# Altium PCB JacDacMicroBitShieldLP 29.PcbDoc
Units mm, origin at the board's own origin, x right, y up, seen from the top; angles counter-clockwise.
Board outline 61.5 x 26.59 mm, 2 copper layers (Top Layer, Bottom Layer), stack 1.525 mm thick; 33 components, 11 nets, 160 pads, 32 vias.
Unrouted connection lines stored in the file: 7.
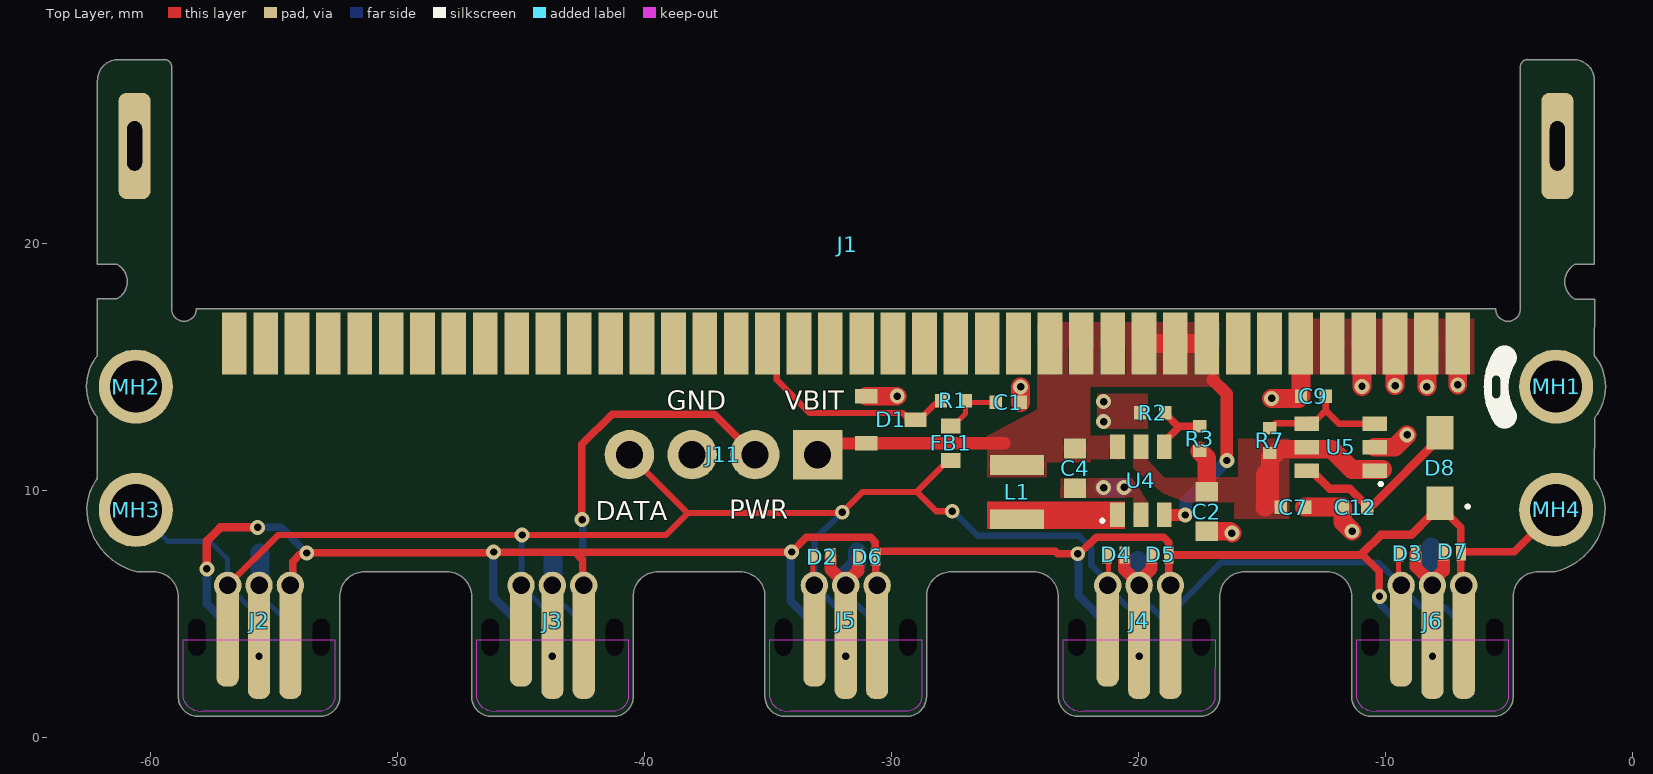
[diagram p0: Top Layer view]
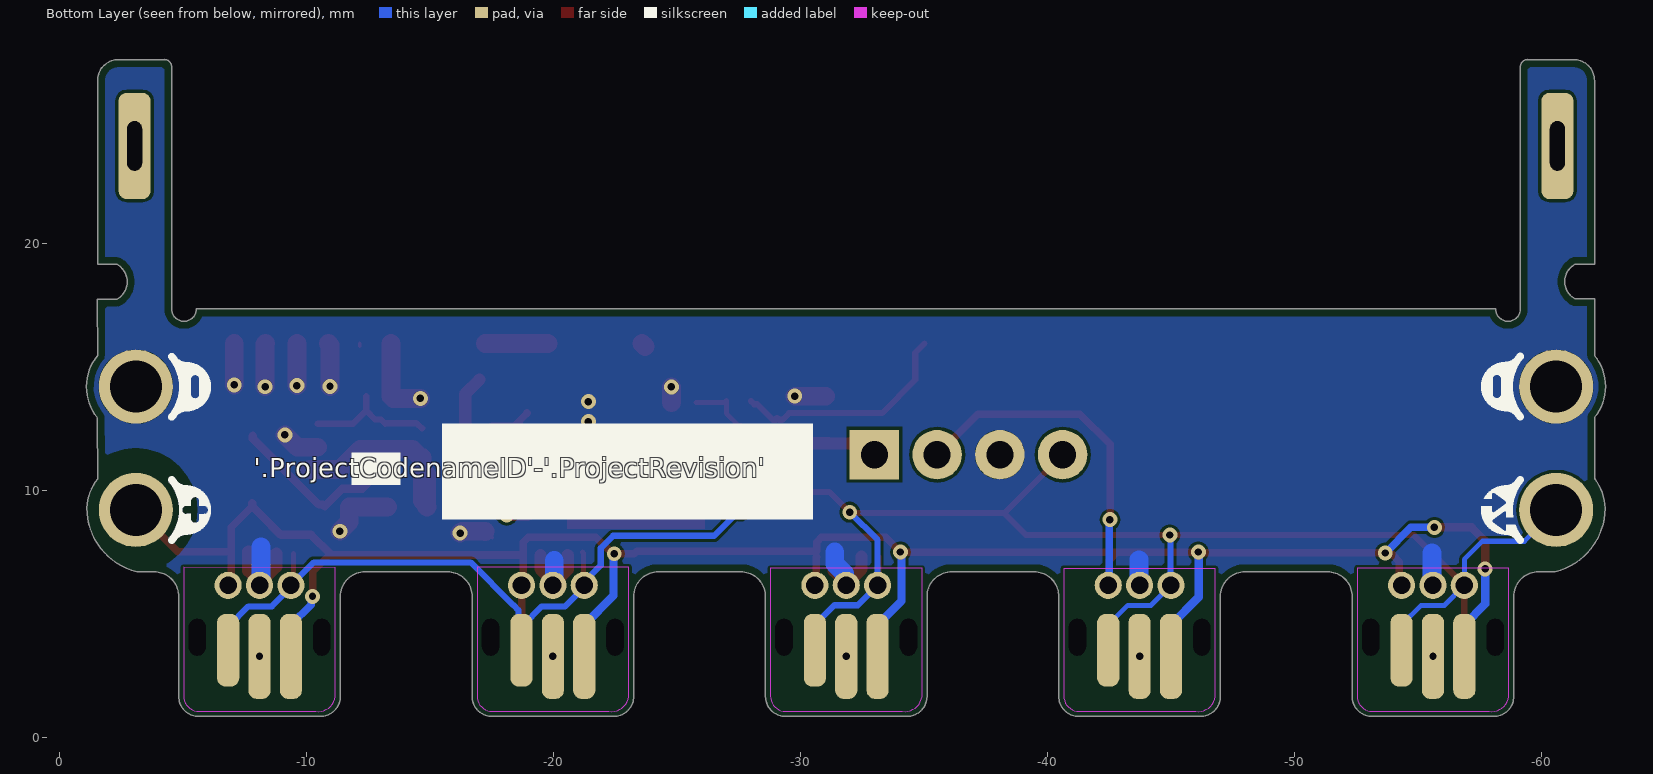
[diagram p1: Bottom Layer view, seen from below]

## Layer stack, top to bottom
Top Solder: solder mask 0.0102, Solder Resist, Dk 3.5
Top Layer: signal copper 0.0356
Dielectric 1: core 1.454, FR-4, Dk 4.2
Bottom Layer: signal copper 0.0356
Bottom Solder: solder mask 0.0102, Solder Resist, Dk 3.5

## Board outline
-58.875,1.644 ccw(c-58.075,1.644) -58.075,0.844 -53.135,0.844 ccw(c-53.135,1.644) -52.335,1.644 -52.335,5.694 cw(c-51.335,5.694) -51.335,6.694 -47.999,6.694 cw(c-47.999,5.694) -46.999,5.694 -46.999,1.644 ccw(c-46.199,1.644) -46.199,0.844 -41.259,0.844 ccw(c-41.259,1.644) -40.459,1.644 -40.459,5.694 cw(c-39.459,5.694) -39.459,6.694 -36.123,6.694 cw(c-36.123,5.694) -35.123,5.694 -35.123,1.644 ccw(c-34.323,1.644) -34.323,0.844 -29.383,0.844 ccw(c-29.383,1.644) -28.583,1.644 -28.583,5.694 cw(c-27.583,5.694) -27.583,6.694 -24.247,6.694 cw(c-24.247,5.694) -23.247,5.694 -23.247,1.644 ccw(c-22.447,1.644) -22.447,0.844 -17.507,0.844 ccw(c-17.507,1.644) -16.707,1.644 -16.707,5.694 cw(c-15.707,5.694) -15.707,6.694 -12.371,6.694 cw(c-12.371,5.694) -11.371,5.694 -11.371,1.644 ccw(c-10.571,1.644) -10.571,0.844 -5.631,0.844 ccw(c-5.631,1.644) -4.831,1.644 -4.831,5.694 cw(c-3.831,5.694) -3.831,6.694 -3.133,6.694 ccw(c-3.775,9.276) -1.115,9.282 ccw(c-3.113,9.205) -1.547,10.449 -1.539,12.927 ccw(c-3.094,14.185) -1.547,15.453 -1.54,17.734 -2.333,17.734 cw(c-1.951,18.434) -2.333,19.134 -1.544,19.134 -1.544,26.573 ccw(c-2.397,26.579) -2.391,27.432 -4.291,27.432 -4.244,27.434 ccw(c-4.244,27.134) -4.544,27.134 -4.543,17.334 cw(c-5.043,17.334) -5.543,17.334 -31.843,17.334 -58.145,17.334 cw(c-58.645,17.334) -59.145,17.334 -59.143,27.134 ccw(c-59.443,27.134) -59.443,27.434 -59.396,27.432 -61.296,27.432 ccw(c-61.296,26.582) -62.147,26.582 -62.147,19.143 -61.357,19.143 cw(c-61.739,18.443) -61.357,17.743 -62.147,17.743 -62.147,15.454 ccw(c-60.593,14.194) -62.149,12.937 -62.151,10.459 ccw(c-60.568,9.229) -62.572,9.271 ccw(c-59.919,9.272) -60.552,6.695 -59.875,6.694 cw(c-59.875,5.694) -58.875,5.694

## Design rules (kind name [scope] priority, off if disabled: settings)
AssemblyTestPointUsage [All] p1: valid=2
BoardOutlineClearance IGNORE_ALIGNMENT_HOLES [InComponent('J1')] p1: gap=0.075 ignorepadtopadclearanceinfootprint=FALSE except(0: THPad-OutlineEdge)
BoardOutlineClearance IGNORE_KEEPOUT [IsKeepOut] p2: gap=0 ignorepadtopadclearanceinfootprint=FALSE
BoardOutlineClearance POLY_COPPER_DISTANCE [IsPolygon] p3: gap=0.3 ignorepadtopadclearanceinfootprint=FALSE
BoardOutlineClearance [All] p4: gap=0.075 ignorepadtopadclearanceinfootprint=FALSE
Clearance CLEARANCE_MH [InNamedPolygon('GND') vs InComponent('MH1') or InComponent('MH4')] p1: gap=0 ignorepadtopadclearanceinfootprint=FALSE except(1: THPad-Fill THPad-Poly THPad-Region)
Clearance CLEARANCE_POLY_DC_DC [InNamedPolygon('DC_DC_VUBIT') or InNamedPolygon('DC_DC_4V05') or InNamedPolygon('DC_DC_GND')] p2: gap=0 ignorepadtopadclearanceinfootprint=FALSE except(0.15: Fill-Fill Fill-Poly Fill-Region Poly-Poly Poly-Region Region-Region)
Clearance [All] p3: gap=0.125 ignorepadtopadclearanceinfootprint=FALSE
DiffPairsRouting [All] p1: maxlimit=2 minlimit=0.15 mostfreqgap=0.15 toplayer_minwidth=0.15 toplayer_maxwidth=2 toplayer_prefwidth=0.15 bottomlayer_minwidth=0.15 bottomlayer_maxwidth=2 bottomlayer_prefwidth=0.15 maxuncoupledlength=25
FabricationTestPointUsage [All] p1: valid=2 allowmultiple=FALSE
HoleSize [All] p1: absolutevalues=TRUE maxlimit=5 minlimit=0.2 maxpercent=80.000 minpercent=20.000
MinimumSolderMaskSliver [All] p1: minsoldermaskwidth=0.005
PlaneClearance [All] p1: clearance=0.3
PlaneConnect [All] p1: planeconnectstyle=Relief reliefexpansion=0.5 reliefentries=4 reliefconductorwidth=0.2 reliefairgap=0.3
PolygonConnect CONNECT_POLY_DC_DC [IsNamedPolygon('DC_DC_GND') or IsNamedPolygon('DC_DC_VUBIT') or IsNamedPolygon('GND') or IsNamedPolygon('DC_DC_4V05')] p1: connectstyle=Relief reliefconductorwidth=0.254 reliefentries=4 polygonreliefangle="90 Angle" airgapwidth=0
PolygonConnect [All] p2: connectstyle=Relief reliefconductorwidth=0.2 reliefentries=4 polygonreliefangle="90 Angle" airgapwidth=0.2
RoutingVias [All] p1: holewidth=0.3 width=0.6 viastyle="Through Hole" minholewidth=0.3 minwidth=0.6 maxholewidth=0.3 maxwidth=0.8
SilkToSilkClearance [All] p1: silktosilkclearance=0.001
SilkToSolderMaskClearance [IsPad] p1: minsilkscreentomaskgap=0.05 clearancetoexposedcopper=TRUE
SolderMaskExpansion SolderMaskExpansion_1 [IsVia] p1: expansion=0.102 istentingtop=TRUE useseparateexpansions=TRUE expansionbottom=0.102 istentingbottom=TRUE
SolderMaskExpansion [All] p2: expansion=0.075 istentingtop=FALSE
Width [All] p1: maxlimit=2 minlimit=0.15 preferedwidth=0.15 minimp=50.000000 maximp=50.000000 favimp=50.000000
21 further rules are at their usual default settings.

## Components (designator, comment, footprint, x,y, rotation, side; value= is the part's Value field where it differs from the comment)
C1 "CL05C330JB51PNC" "C0402_0.55MM - without outline" -25.275,13.55 r180 top
C2 "CL10A106KP8NNNC" "C0603 - without outline" -17.238,9.13 r90 top locked
C4 "CL10A106KP8NNNC" "C0603 - without outline" -22.57,10.88 r90 top
C7 "CL05A475MP5NRNC" "R0402 - Without outline" -13.743,9.305 r180 top
C9 "CL05A475MP5NRNC" "R0402 - Without outline" -12.925,13.8 r0 top
C12 "CL05A475MP5NRNC" "R0402 - Without outline" -11.236,9.313 r0 top
D1 "BAT54S" "NXP-BAT54S-TO-236AB - without outline" -30.025,12.85 r0 top
D2 "RCLAMP0521P-N" "TVS 0402 - L" -32.823,7.31 r0 top
D3 "RCLAMP0521P-N" "TVS 0402 - L" -9.13,7.436 r0 top
D4 "RCLAMP0521P-N" "TVS 0402 - L" -20.925,7.375 r0 top
D5 "RCLAMP0521P-N" "TVS 0402 - L" -19.125,7.375 r180 top
D6 "RCLAMP0521P-N" "TVS 0402 - L" -31,7.3 r180 top
D7 "RCLAMP0521P-N" "TVS 0402 - L" -7.3,7.5 r180 top
D8 "MBR120VLSFT3G" MBR120VLSFT3G -7.8,10.9 r90 top
FB1 "TDK MPZ1608S102ATA00" "TDK MPZ1608 0.8mm - without outline" -27.6,11.9 r90 top
J1 "Planar 1x40p 1.27 mm pitch edge connector for the micro:bit" MIC127-140-D01 -31.843,17.334 r0 top
J2 "Jacdac edge connector" JACDAC_EDGE_CONNECTOR_NO_TRACES -55.605,6.694 r180 top
J3 "Jacdac edge connector" JACDAC_EDGE_CONNECTOR_NO_TRACES -43.729,6.694 r180 top
J4 "JACDAC edge connector" JACDAC_EDGE_CONNECTOR_NO_TRACES -19.977,6.694 r180 top
J5 "Jacdac edge connector" JACDAC_EDGE_CONNECTOR_NO_TRACES -31.853,6.694 r180 top
J6 "Jacdac edge connector" JACDAC_EDGE_CONNECTOR_NO_TRACES -8.101,6.694 r180 top
J11 "0.1\"" "Generic 1x4 2.54mm header" -35.533,11.435 r0 top
L1 "NRH3010T100MN" NRH3010T100MN -24.919,9.919 r270 top
MH1 "" MH_5.0MMK_3.0MMC_2.1MMD_PTH -3.093,14.194 r90 top
MH2 "Mounting holes; 2.5 mm pitch" MH_5.0MMK_3.0MMC_2.1MMD_PTH -60.593,14.194 r90 top
MH3 "Mounting holes; 2.5mm pitch" MH_5.0MMK_3.0MMC_2.1MMD_PTH -60.593,9.196 r90 top
MH4 "MH_5.0MMK_3.0MMC_2.1MMD_PTH" MH_5.0MMK_3.0MMC_2.1MMD_PTH -3.093,9.196 r90 top
R1 "0402WGF2200TCE" "R0402 - Without outline" -27.5,13.625 r0 top
R2 "RC0402FR-07137KL" "R0402 - Without outline" -19.425,13.125 r0 top
R3 "0402WGF1004TCE" "R0402 - Without outline" -17.525,12.081 r270 top
R7 "0402WGF1004TCE" "R0402 - Without outline" -14.689,12.002 r270 top
U4 "TLV61220" "TI-TLV61220 - without_outline" -19.907,10.38 r90 top locked
U5 "TPS2553DBVR" "TI-TPS2553 - without_outline" -11.818,11.734 r180 top

## Footprints (in the part's own frame and the unit in brackets; to place one, negate y for a bottom-side part, rotate by r counter-clockwise, add the part's x,y. Pads: shape width x height; smd on the part's side, far side on the other; paste and mask are expansions set on the pad)
"C0402_0.55MM - without outline" [mm]
  rect 0.5x0.55 smd: 1(-0.5,0) 2(0.5,0)
  body extent -0.5,-0.25 0.5,0.25, height 0.55
"C0603 - without outline" [mm]
  rect 0.8x0.9 smd: 1(-0.8,0) 2(0.8,0)
  body extent -0.9,-0.5 0.9,0.5, height 0.9
"Generic 1x4 2.54mm header" [mm] "1x4 2.54mm 0.1\" header vertical th"
  rect 2x2 hole 1.1: 1(2.54,0)
  round 2 hole 1.1: 2(0,0) 3(-2.54,0) 4(-5.08,0)
  body extent -6.35,-1.27 3.81,1.27, height 8.65
JACDAC_EDGE_CONNECTOR_NO_TRACES [mm] "JacDac 3 pin connector with no traces"
  rrect78% 0.9x2.95 smd far side paste-1 mask+0: 1(-1.27,3.175)
  rrect78% 0.9x4.3 smd paste-1 mask+0: 1(1.27,2.5)
  round 1.11 / inner round 0.71 / far side round 1.1 hole 0.71 paste-0.254 mask+0: 1(1.27,0.55) 2(0,0.55) 3(-1.27,0.55)
  rrect78% 0.9x3.45 smd far side paste-1 mask+0: 2(0,3.425) 3(1.27,3.425)
  rrect78% 0.9x4.8 smd paste-1 mask+0: 2(0,2.75) 3(-1.27,2.75)
  round 0 hole 0.7 slot 1.5 at 90 deg unplated: ""(-2.52,2.65) ""(2.52,2.65)
  Top Layer keep-out region: -3.075,2.75 -3.07,5.033 -2.987,5.341 -2.761,5.567 -2.453,5.65 -2.453,5.65 2.27,5.65 2.545,5.635 2.794,5.516 2.978,5.31 3.07,5.05 3.07,5.05 3.07,2.75
  Bottom Layer lines w0.2: -1.126,0.85 -1.27,0.85
  Bottom Layer keep-out region: -3.07,-0.15 -3.07,5.033 -3.023,5.269 -2.889,5.469 -2.689,5.603 -2.453,5.65 -2.453,5.65 2.27,5.65 2.545,5.635 2.794,5.516 2.978,5.31 3.07,5.05 3.07,5.05 3.07,-0.15
MBR120VLSFT3G [mm] "SODFL, 2-Leads, Body 1.65x3.60mm, IPC Medium Density"
  rect 1.35x1.1 smd: 1(-1.425,0) 2(1.425,0)
  body extent -1.73,-0.82 1.72,0.82, height 0.95
MH_5.0MMK_3.0MMC_2.1MMD_PTH [mm] "Mounting Hole 5.0mm clearance, 3.1 annualar ring and 2.1mm PTH"
  round 3 hole 2.1 mask+0.05: 1(0,0)
MIC127-140-D01 [mm] "Planar 1x40p 1.27 mm pitch edge connector for the micro:bit"
  rect 1x2.5 smd paste-0.254: 1(-24.765,-1.4) 2(-23.495,-1.4) 3(-22.225,-1.4) 4(-20.955,-1.4) 5(-19.685,-1.4) 6(-18.415,-1.4) 7(-17.145,-1.4) 8(-15.875,-1.4) 9(-14.605,-1.4) 10(-13.335,-1.4) 11(-12.065,-1.4) 12(-10.795,-1.4) 13(-9.525,-1.4) 14(-8.255,-1.4) 15(-6.985,-1.4) 16(-5.715,-1.4) 17(-4.445,-1.4) 18(-3.175,-1.4) 19(-1.905,-1.4) 20(-0.635,-1.4) 21(0.635,-1.4) 22(1.905,-1.4) 23(3.175,-1.4) 24(4.445,-1.4) 25(5.715,-1.4) 26(6.985,-1.4) 27(8.255,-1.4) 28(9.525,-1.4) 29(10.795,-1.4) 30(12.065,-1.4) 31(13.335,-1.4) 32(14.605,-1.4) 33(15.875,-1.4) 34(17.145,-1.4) 35(18.415,-1.4) 37(20.955,-1.4) 38(22.225,-1.4) 39(23.495,-1.4) 40(24.765,-1.4)
  rect 1x2.5 smd: 36(19.685,-1.4)
  rrect50% 1.3x4.3 hole 2 slot 0.6 at 0 deg: 41(-28.8,6.6) 42(28.8,6.6)
  round 0 hole 1.15 unplated mask+0: 43(-29.8,1.1) 44(29.892,1.1)
  body extent -30.3,-1.7 30.3,10.1, height 2.95
NRH3010T100MN [mm]
  rect 0.8x2.2 smd paste-0.254: 1(-1.1,0) 2(1.1,0)
  body extent -1.5,-1.5 1.5,1.5, height 1
"NXP-BAT54S-TO-236AB - without outline" [mm] "SOT23, 3-Leads, Body 2.90x2.30mm, Pitch 0.95mm, IPC Medium Density"
  rect 0.9x0.6 smd: 1(-1,0.95) 2(-1,-0.95) 3(1,0)
  body extent -1.32,-1.5 1.32,1.5, height 1.12
"R0402 - Without outline" [mm]
  rect 0.5x0.55 smd: 1(-0.5,0) 2(0.5,0)
  body extent -0.5,-0.25 0.5,0.25, height 0.35
"TDK MPZ1608 0.8mm - without outline" [mm]
  rect 0.6x0.8 smd paste-0.1: 1(-0.7,0) 2(0.7,0)
  body extent -0.8,-0.4 0.8,0.4, height 0.8
"TI-TLV61220 - without_outline" [mm] "SOT23, 6-Leads, Body 2.90x2.80mm, Pitch 0.95mm, IPC Medium Density"
  rect 1x0.6 smd: 1(-1.375,0.95) 2(-1.375,0) 3(-1.375,-0.95) 4(1.375,-0.95) 5(1.375,0) 6(1.375,0.95)
  body extent -1.52,-1.52 1.53,1.53, height 1.1
"TI-TPS2553 - without_outline" [mm] "SOT23, 6-Leads, Body 2.90x2.80mm, Pitch 0.95mm, IPC Medium Density"
  rect 1x0.6 smd: 1(-1.375,0.95) 2(-1.375,0) 3(-1.375,-0.95) 4(1.375,-0.95) 5(1.375,0) 6(1.375,0.95)
  body extent -1.52,-1.52 1.53,1.53, height 1.1
"TVS 0402 - L" [mm] "TVS 0402 RoHS"
  rect 0.4x0.7 smd paste-0.038 mask+0.05: 1(-0.35,0) 2(0.35,0)
  body extent -0.5,-0.3 0.5,0.3, height 0.5

## Part data
C1: "CAP CER 33PF 50V NP0 0402", Capacitance=33pF, Case Code (Imperial)=0402, Case Code (Metric)=1005, Manufacturer=Samsung, Max Operating Temperature=125°C, Min Operating Temperature=-55°C, Ratings=AEC-Q200, Supplier Part Number 1=1276-6515-1-ND, Tolerance=5%, Voltage Rating=50V, Case/Package=0402, Category=Capacitors, Checked=?, ComponentLink1Description="Samsung datasheet online", ComponentLink1URL=http://www.samsungsem.com/kr/support/library/product-catalog/mlcc.jsp, Created=DG, Lead Free="Lead Free", Length=0.039inch, Manufacturer Part Number=CL05C330JB51PNC, Mount="Surface Mount", Packaging="Tape and Reel", Pricing 1="1=0.10000, 10=0.07500, 50=0.04060, 100=0.03320, 500=0.02374, 1000=0.01865, 2500=0.01696, 5000=0.01560 (USD)", Pricing 2="1=0.11000, 10=0.08200, 100=0.03600, 500=0.02600, 1000=0.02000, 2500=0.01800 (USD)", Pricing 3="10000=0.00780 (USD)", RoHS=Yes, Stock 1=250654, Stock 2=97900, Stock 3=100000, Supplier 1=Digi-Key, Supplier 2=Mouser, Supplier 3="Future Electronics", Supplier Part Number 2=187-CL05C330JB51PNC, Supplier Part Number 3=6022520, Thickness=0.022inch, Width=0.02inch
C2 C4: "CAP CER 10UF 10V X5R 0603", Capacitance=10uF, Case Code (Imperial)=0603, Case Code (Metric)=1608, Dielectric=X5R, Manufacturer=Samsung, Max Operating Temperature=85°C, Min Operating Temperature=-55°C, Package Quantity=1, Supplier Part Number 1=1276-1192-1-ND, Tolerance=10%, Voltage Rating=10V, Case/Package=0603, Category="Ceramic Capacitors", ComponentLink1Description="Online datasheet", ComponentLink1URL=https://datasheet.ciiva.com/26877/getdatasheetpartid-359551-26877881.pdf, Contact Plating=Tin, Depth=0.8mm, Height=0.8mm, Lead Free="Lead Free", Length=1.6mm, Manufacturer Part Number=CL10A106KP8NNNC, Material=Ceramic, Mount="Surface Mount", Packaging="Tape and Reel", Pricing 1="1=0.21000, 10=0.14800, 50=0.08420, 100=0.06980, 500=0.04892, 1000=0.04050 (USD)", Pricing 2="1=0.19000, 10=0.13200, 100=0.06700, 500=0.04500, 1000=0.04000, 2500=0.03400 (USD)", Pricing 3="10=0.08380, 100=0.06930, 500=0.04170, 1000=0.03410, 2000=0.03370, 4000=0.02700, 20000=0.02200 (GBP)", Radiation Hardening=No, RoHS=Yes, Stock 1=1098575, Stock 2=194338, Stock 3=11777, Supplier 1=Digi-Key, Supplier 2=Mouser, Supplier 3=Farnell, Supplier Part Number 2=187-CL10A106KP8NNNC, Supplier Part Number 3=3013386, Thickness=0.035inch, Voltage Rating (DC)=10V, Width=0.031inch
C7 C9 C12: "CAP CER 4.7UF 10V X5R 0402", Capacitance=4.7uF, Case Code (Imperial)=0402, Case Code (Metric)=1005, Dielectric=X5R, Manufacturer=Samsung, Max Operating Temperature=85°C, Min Operating Temperature=-55°C, Package Quantity=10000, Supplier Part Number 1=1276-1482-2-ND, Tolerance=20%, Voltage Rating=10V, Case/Package=0402, Category="Ceramic Capacitors", Checked By=?, ComponentLink1Description="Online datasheet", ComponentLink1URL=https://datasheet.ciiva.com/25786/cl05a475mp5nrnc-25786963.pdf, Created By="D. Gakure", Lead Free="Lead Free", Length=0.039inch, Manufacturer Part Number=CL05A475MP5NRNC, Mount="Surface Mount", Packaging="Tape and Reel", Pricing 1="10000=0.01405, 20000=0.01338 (USD)", Pricing 2="1=0.23500, 500=0.03970, 1500=0.02900, 2500=0.02500, 5000=0.02050 (USD)", RoHS=Yes, RoHS Compliant=Yes, Series=CL, Stock 1=840000, Stock 2=2004, Supplier 1=Digi-Key, Supplier 2="Future Electronics", Supplier Part Number 2=2103694, Thickness=0.022inch, Width=0.02inch
D1: "DIODE ARRAY SCHOTTKY 30V SOT23", Manufacturer=Nexperia, Manufacturer Part Number=BAT54S,235, Supplier Part Number 1=1727-1868-1-ND, Category="Rectifier Diodes", ComponentLink1Description="NXP datasheet online", ComponentLink1URL=https://assets.nexperia.com/documents/data-sheet/BAT54_SER.pdf, Pricing 1="1=0.13000, 10=0.11900, 100=0.05610, 500=0.03326, 1000=0.02185, 5000=0.02138 (USD)", RoHS=No, Stock 1=14011, Supplier 1=Digi-Key, Supplier 2=Mouser, Supplier 3=RSComponents, Supplier Part Number 2=771-BAT54S235, Supplier Part Number 3=1707990
D2 D3 D4 D5 D6 D7: "Bidirectional 5V (Max) 6V 16V 3.5A (8/20us) 0402 TVS RoHS", Manufacturer="Born Semiconductor", Package=0402, Supplier1 Part Number=C316043, Checked By=?, ComponentLink1Description="Online datasheet", ComponentLink1URL=https://datasheet.lcsc.com/szlcsc/Bourne-Semicon-Shenzhen-RCLAMP0521P-N_C316043.pdf, Created By="D Gakure", Manufacturer Part Number=RCLAMP0521P-N, Supplier1=LCSC
D8: "DIODE SCHOTTKY 20V 1A SOD123FL", Average Rectified Current=1A, Forward Voltage=340mV, Manufacturer="ON Semiconductor", Max Forward Surge Current (Ifsm)=45A, Max Operating Temperature=125°C, Max Repetitive Reverse Voltage (Vrrm)=20V, Max Reverse Leakage Current=600uA, Min Operating Temperature=-65°C, Package Quantity=10000, Supplier Part Number 1=MBR120VLSFT3GOSCT-ND, Category="Schottky Diodes", ComponentLink4Description="On Semi datasheet online", ComponentLink4URL=https://datasheet.ciiva.com/6380/mbr120vlsft1-d-6380910.pdf, Current Rating=1A, Element Configuration=Single, Forward Current=1A, Halogen Free="Halogen Free", Lead Free="Lead Free", Manufacturer Part Number=MBR120VLSFT3G, Max Reverse Voltage (DC)=20V, Max Surge Current=45A, Number of Pins=2, Output Current=1A, Packaging="Tape and Reel", Peak Non-Repetitive Surge Current=45A, Peak Reverse Current=600uA, Polarity=Standard, Pricing 1="1=0.39000, 10=0.28600, 100=0.19920, 500=0.12616, 1000=0.10292, 2000=0.09960, 5000=0.09628 (USD)", Radiation Hardening=No, REACH SVHC="No SVHC", RoHS=Yes, Stock 1=32481, Supplier 1=Digi-Key, Supplier 2=Mouser, Supplier 3=RSComponents, Supplier Part Number 2=863-MBR120VLSFT3G, Supplier Part Number 3=1867479, Voltage Rating (DC)=20V
FB1: "0603 1k@100MHz 0.8A chip", Case Code (Imperial)=0603, Case Code (Metric)=1608, Current Rating=800mA, DC Resistance (DCR)=300mR, Manufacturer=TDK, Manufacturer Part Number=MPZ1608S102ATA00, Package Quantity=4000, Supplier Part Number 1=445-8694-1-ND, Tolerance=25%, Case/Package=0603, ComponentLink2Description="datasheet online", ComponentLink2URL=https://www.mouser.co.uk/datasheet/2/400/eads_commercial_power_mpz1608_en-923650.pdf, ComponentLink3Description=datasheet, ComponentLink3URL="Y:\System\Altium\Libraries 2014\TDK\Datasheets\eads_commercial_power_mpz1608_en-923650.pdf", Core Material=Ferrite, Height=0.037inch, Impedance="1kR @ 100MHz", Length=0.063inch, Max DC Current=800mA, Mount="Surface Mount", Packaging="Tape and Reel", Pricing 1="1=0.1, 10=0.079, 25=0.0716, 50=0.0644, 100=0.0472, 250=0.03432, 500=0.03146, 1000=0.02717 (USD)", Stock 1=113542, Supplier 1=Digi-Key, Supplier 2=Mouser, Supplier Part Number 2=810-MPZ1608S102ATA00, Width=0.031inch
J1: library part MIC127-140-D01, "\"Same plane\" 1x40p 1.27mm Dongguan Yuliang BBC micro:bit edge connector", Manufacturer="Dongguan Yuliang", ComponentLink1Description="Yuliang drawing", ComponentLink1URL="Y:\System\Altium\Libraries 2014\Yuliang\Datasheets\YULIANG-MIC127-140-D01.pdf", ComponentLink2Description="Yuliang drawing online", ComponentLink2URL=http://www.dgyuliang.net/d/file/Produtcs/Customized%20Connector/MICRO%20BIT%20Connector/aff70b8859d81d58072ddeb323d41b1d.pdf, Manufacturer Part Number=MIC127-140-D01
J2 J3 J4 J5 J6: "3 pin jacdac edge connector 1.27mm pitch", Manufacturer Part Number=JACDAC_EDGE_CONNECTOR, Checked By=?, ComponentLink1Description="Yuliang JACDAC cable connector drawing online", ComponentLink1URL=https://github.com/microsoft/jacdac-mdk/blob/main/connector/JACDAC-Connector-by-Yuliang-2020-11-28.pdf, ComponentLink2Description="JACDAC PCB edge connector spec onlin", ComponentLink2URL=https://github.com/microsoft/jacdac-mdk/blob/main/connector/JACDAC_PCB_Edge_Connector_Drawing_JD-PEC-01_rev_01.pdf, Created By="D. Gakure", PCB Type="1.6mm FR4"
J11: library part "Header Multicomp 2211S-04G-whitesch", "2.54mm, 4x1 way, vertical, square pin, gold plate", Contact Resistance=20, Current Rating=3, Flammability Rating=UL94V-0, Insulation Resistance=1000, Manufacturer=Multicomp, Manufacturer Part Number=2211S-04G, Operating Temperature Max=105, Operating Temperature Min=-40, Supplier Part Number 1=1593413, Voltage Rating V AC=250, Withstand Voltage="600V<!--FANDB--><div class=\"features-and-benefits-container\"><div class=\"features-and-benefits-description\"><span class=\"features-benefits-value\">The 2211S-04G is a 4-pin 1-row PCB Header with gold plated copper alloy contacts and a black high temperature plastic (PBT) insulator. This board-to-board holder is ideal for through hole vertical mounting.</span></div><div class=\"features-and-benefits-list\"><ul class=\"features-and-benefits-list-list\"><li class=\"features-and-benefits-list-item\">3A AC/DC Rated current</li><li class=\"features-and-benefits-list-item\">250VAC/DC Rated voltage</li><li class=\"features-and-benefits-list-item\">20", ComponentLink1Description="header strip datasheet", ComponentLink1URL=http://www.farnell.com/datasheets/1518407.pdf, Contact Material="Copper Alloy", Contact Plating="Gold Plated Contacts", Contact Termination=Solder, Contact Termination Type="Through Hole", Created By=HUGHWI, Gender=Header, Lead Spacing=2.54, No. of Contacts=4, No. of Rows=1, Pitch Spacing=2.54, Pricing 1="1=0.0973, 5=0.0918, 25=0.0864, 50=0.0808, 100=0.0753, 250=0.032 (GBP)", Product Range=2211, RoHS=YES, Stock 1=2760, Supplier 1=Farnell, SVHC="No SVHC (17-Dec-2015)", Termination Method=Solder
L1: "Inductor, Shielded, 10uH, 600mA, SMD; NRH Series; Inductance:10 H; Inductance Tolerance: 20%; Inductor Construction:Shielded; DC Resistance Max:0.35ohm; RMS Current (Irms):620mA; Saturation Current (Isat):600mA ;RoHS Compliant: Yes", Case/Package=3010, Current Rating=620mA, DC Resistance (DCR)=350mR, Inductance=10uH, Inductance Tolerance=20%, Manufacturer="Taiyo Yuden", Max DC Current=600mA, Max Operating Temperature=120°C, Min Operating Temperature=-25°C, Package Quantity=2000, Self Resonant Frequency=34MHz, Supplier Part Number 1=587-2575-1-ND, Test Frequency=100kHz, Category="Fixed Inductors", ComponentLink2Description="Taiyo Yuden spec sheet online", ComponentLink2URL=https://datasheet.ciiva.com/1043/nrh3010t100mn-ss-1043273.pdf, ComponentLink3Description="Taiyo Yuden data sheet (2015) online", ComponentLink3URL=https://datasheet.ciiva.com/8002/wound04-e-8002182.pdf?src-supplier=Element14, Composition=Wirewound, Core Material=Ferrite, Depth=3.1mm, Halogen Free="Halogen Free", Height=1mm, Height - Seated (Max)=0.039inch, Lead Free="Lead Free", Length=3mm, Manufacturer Part Number=NRH3010T100MN, Mount="Surface Mount", Packaging="Tape and Reel", Pricing 1="1=0.31000, 10=0.27600, 25=0.24120, 50=0.20680, 100=0.18950, 250=0.17224, 500=0.16192, 1000=0.12402 (USD)", Radiation Hardening=No, REACH SVHC=Unknown, RMS Current (Irms)=620mA, RoHS=Yes, Saturation Current=600mA, Shielding=Shielded, Stock 1=2000, Supplier 1=Digi-Key, Supplier 2=Mouser, Supplier Part Number 2=963-NRH3010T100MN, Termination=SMD/SMT, Tolerance=20%, Width=3mm
MH1 MH2 MH3: library part MH_5.0MMK_3.0MMC_2.1MMD_PTH, "Mounting Hole 5.0mm keepout, 3.0mm annualar ring and 2.1mm Drill PTH"
MH4: "Mounting Hole 5.0mm keepout, 3.0mm annualar ring and 2.1mm Drill PTH"
R1: "RES SMD 220 OHM 1% 1/16W 0402", Case Code (Imperial)=0402, Manufacturer="Uniroyal Elec", Resistance=220R, Tolerance=1%, Manufacturer Part Number=0402WGF2200TCE
R2: "RES SMD 137K OHM 1% 1/16W 0402", Case Code (Imperial)=0402, Case Code (Metric)=1005, Manufacturer=Yageo, Max Operating Temperature=155°C, Max Power Dissipation=63mW, Min Operating Temperature=-55°C, Power Rating=62.5mW, Resistance=137kR, Resistor Type="Thick Film", Supplier Part Number 1=YAG2972CT-ND, Temperature Coefficient=100ppm/°C, Tolerance=1%, Voltage Rating=50V, Case/Package=0402, Category="Chip SMD Resistors", ComponentLink1Description="Online datasheet", ComponentLink1URL=https://datasheet.ciiva.com/16744/pyu-rc0402-51-rohs-l-6-r-16744009.pdf, Construction=Rectangular, Contact Plating=Tin,Matte, Depth=0.5mm, Features="Moisture Resistant", Height=0.016inch, Lead Free="Lead Free", Length=1mm, Manufacturer Part Number=RC0402FR-07137KL, Military Standard=Not, Number of Terminations=2, Packaging="Tape and Reel", Pricing 1="1=0.10000, 10=0.01600, 100=0.00660, 1000=0.00299, 2500=0.00259, 5000=0.00214 (USD)", Pricing 2="10000=0.00090, 20000=0.00088, 40000=0.00086, 60000=0.00084, 80000=0.00081, 100000=0.00079, 1000000=0.00077 (USD)", Pricing 3="1=0.10000, 10=0.01600, 50=0.01600, 100=0.00600, 1000=0.00300, 10000=0.00100 (USD)", RoHS=Yes, RoHS Compliant=Yes, Series=RC, Stock 1=47599, Supplier 1=Digi-Key, Supplier 2=Avnet, Supplier 3=Mouser, Supplier Part Number 2=RC0402FR-07137KL, Supplier Part Number 3=603-RC0402FR-07137KL, Technology="THICK FILM", Termination=SMD/SMT, Width=0.02inch, Working Voltage=50V
R3 R7: "RES SMD 1M OHM 1% 1/16W 0402", Case Code (Imperial)=0402, Manufacturer="Uniroyal Elec", Resistance=1M, Tolerance=1%, Manufacturer Part Number=0402WGF1004TCE
U4: "IC REG BST ADJ 0.22A SYNC SOT23", Case/Package=SOT-23-6, Manufacturer 1="Texas Instruments", Manufacturer Part Number=TLV61220DBVR, Max Input Voltage=5.5V, Max Operating Temperature=85°C, Max Output Current=400mA, Min Input Voltage=700mV, Min Operating Temperature=-40°C, Min Output Voltage=1.8V, Output Current=200mA, Package Quantity=1, Quiescent Current=5uA, Supplier Part Number 1=296-30547-1-ND, Switching Frequency=2MHz, Category="Voltage Regulators - Switching", ComponentLink5Description="Datasheet (online)", ComponentLink5URL=https://www.ti.com/lit/ds/symlink/tlv61220.pdf, ComponentLink6Description="Datasheet (offline)", ComponentLink6URL="Y:\System\Altium\Libraries 2014\TexasInstruments\datasheets\tlv61220.pdf", Efficiency=95%, Height=1.3mm, Lead Free="Lead Free", Length=3.05mm, Max Output Voltage=5.5V, Mount="Surface Mount", Number of Outputs=1, Number of Pins=6, Output Configuration=Positive, Output Type=Adjustable, Output Voltage=5.5V, Packaging="Tape and Reel", Pricing 1="1=0.99000, 10=0.88500, 25=0.84000, 100=0.64500, 250=0.57000, 500=0.54000, 1000=0.42000 (USD)", Radiation Hardening=No, REACH SVHC="No SVHC", RoHS=Yes, Stock 1=42159, Supplier 1=Digi-Key, Supplier 2=Farnell, Supplier 3=Mouser, Supplier Part Number 2=3007284, Supplier Part Number 3=595-TLV61220DBVR, Synchronous Rectifier=Yes, Topology=Boost, Width=1.75mm
U5: "POWER LOAD SWITCH, HIGH SIDE, SOT-23-6; Power Load Switch Type:High Side; Input Voltage:6.5V; Current Limit:1.7A; On State Resistance:0.085ohm; Distribution Switch Case Style:SOT-23; No. of Pins:6; Thermal Protection:Yes; On / Enable;RoHS Compliant: Yes", Case/Package=SOT-23, Manufacturer 1="Texas Instruments", Max Input Voltage=6.5V, Max Operating Temperature=85°C, Max Power Dissipation=625mW, Min Input Voltage=2.5V, Min Operating Temperature=-40°C, On-State Resistance=85mR, Output Current=1.5A, Package Quantity=1, Supplier Part Number 1=296-32464-1-ND, Category="Hot Swap Controllers", ComponentLink1Description=https://datasheet.ciiva.com/15108/getdatasheetpartid-297517-15108509.pdf?src-supplier=Verical, ComponentLink1URL=https://datasheet.ciiva.com/15108/getdatasheetpartid-297517-15108509.pdf?src-supplier=Verical, Lead Free="Lead Free", Manufacturer Part Number=TPS2553DBVR, Max Supply Voltage=6.5V, Min Supply Voltage=2.5V, Number of Outputs=1, Number of Pins=6, Packaging="Tape and Reel", Pricing 1="1=1.20000, 10=1.07100, 25=1.01640, 100=0.78050, 250=0.68972, 500=0.65340, 1000=0.50820 (USD)", Radiation Hardening=No, REACH SVHC="No SVHC", RoHS=Yes, Stock 1=14713, Supplier 1=Digi-Key, Supplier 2=Farnell, Supplier 3=Mouser, Supplier Part Number 2=3124082, Supplier Part Number 3=595-TPS2553DBVR, Weight=0.00127oz

## Via types
v1: diameter 0.6, hole 0.3, Top Layer to Bottom Layer, tented both sides, 32 vias

## Nets (pads, with @x,y where several pads share a name; then routed paths per layer and width w, separated by ;. In a path a pad name is that pad's centre, name@x,y a point inside that pad or via, vN(x,y) a via of type N, cw(c..) or ccw(c..) an arc to the next point about the centre after c; other vN are vias at no path point)
4V15: C2.2 C7.2 R3.2 R7.2 U4.5 U5.1 U5.5 | length 10.7
  Top Layer w0.254: C2.2 -17.238,10.885
  Top Layer w0.762: R3.2 -17.238,11.295 -17.238,10.885 C2.2 ; -14.883,9.313 -14.864,9.332 -14.864,10.65 ; -14.689,9.557 -14.689,11.327 -14.614,11.327 -14.289,11.653 U5.5@-13.274,11.653 ; U5.5@-13.112,11.653 -12.176,11.653 -11.356,10.832 U5.1@-10.118,10.832
GND: C1.1 C2.1 C4.1 C7.1 C9.1 C12.1 D1.1 D2.2 D3.2 D4.2 D5.2 D6.2 D7.2 J1.35 J1.36 J1.37 J1.38 J1.39 J1.40 J2.2 J3.2 J4.2 J5.2 J6.2 J11.3 MH1.1 MH2.1 R2.1 U4.2 U5.2 | length 34.1
  Top Layer w0.15: C2.1@-17.523,8.078 C2.1@-17.296,8.305 ; J1.35@-13.5,15.863 J1.35 ; C9.1@-13.428,13.803 C9.1 ; J1.36@-12.158,15.834 J1.36
  Top Layer w0.5: D2.2 -32.473,6.809 -31.853,6.19 -31.853,6.144 -31.853,6.239 -31.35,6.742 D6.2 ; D4.2 -20.575,6.787 J4.2@-19.977,6.19 ; J4.2@-19.977,6.144 J4.2@-19.977,6.19 ; D5.2 -19.475,6.812 -19.977,6.309 J4.2@-19.977,6.19 ; D3.2 -8.78,6.898 -8.101,6.219 -8.101,6.144 -8.101,6.291 -7.65,6.742 D7.2
  Top Layer w0.762: D1.1 v1@-29.778,13.8 ; C1.1 v1(-24.775,14.178) ; C2.1 -17.236,8.332 -16.294,8.332 v1(-16.221,8.259) ; v1(-14.614,13.712) -13.513,13.712 C9.1 ; C9.1@-13.428,13.803 J1.35 ; C7.1@-13.283,9.313 C12.1 -11.736,8.712 v1(-11.356,8.332) ; v1(-10.955,14.199) -10.955,15.868 J1.37 ; U5.2 -9.627,11.734 v1(-9.126,12.235) ; J1.38 -9.616,15.932 v1(-9.616,14.229) ; J1.39 -8.325,15.911 v1(-8.325,14.186) ; v1(-7.078,14.259) J1.40
  Bottom Layer w0.762: J2.2@-55.605,6.144 -55.563,6.186 -55.563,7.456 ; J3.2@-43.729,6.144 -43.704,6.17 -43.704,7.179 ; J5.2@-31.853,6.144 -31.789,6.209 -31.789,6.62 -31.39,7.019 -31.39,7.494 ; v1(-21.413,10.1) -21.134,10.1 -21.122,10.112 v1(-20.583,10.112) ; -20.034,7.156 -20.034,6.201 J4.2@-19.977,6.144 ; -8.162,7.7 -8.162,6.205 J6.2@-8.101,6.144
  other v1: -55.605,3.269 -43.729,3.269 -31.853,3.269 -19.977,3.269 -8.101,3.269 -21.415,12.772 -21.413,13.585 -29.769,13.808
JD_DATA: D2.1 D3.1 D4.1 FB1.1 J2.1 J3.1 J4.1 J5.1 J6.1 J11.4 MH3.1 | length 93.7
  Top Layer w0.203: D2.1 -33.173,6.194 J5.1@-33.123,6.144 ; J4.1@-21.247,6.144 -21.211,6.181 -21.211,7.458 D4.1@-21.175,7.494 ; D3.1 -9.48,6.253 -9.371,6.144 J6.1@-9.398,6.171
  Top Layer w0.25: J2.1@-56.875,4.194 -56.875,6.144 -54.838,8.182 v1(-44.955,8.182) -39.135,8.182 -38.247,9.069 ; J11.4 -38.247,9.069 ; FB1.1 -27.7,11.2 -28.97,9.93 ; v1(-27.539,9.148) -28.188,9.148 -28.97,9.93 ; -38.247,9.069 -32.035,9.069 v1(-31.997,9.107) -31.174,9.93 -28.97,9.93
  Bottom Layer w0.203: MH3.1 -60.572,9.196 -59.306,7.93 -57.606,7.93 -56.875,7.2 -56.875,6.144 -56.069,5.338 -55.129,5.338 -54.335,4.544 J2.1@-54.335,3.519 ; MH3.1@-59.348,9.657 MH3.1@-59.332,9.657 ; J3.1@-44.977,6.167 -44.999,6.144 -44.193,5.338 -43.253,5.338 -42.459,4.544 J3.1@-42.459,3.519 ; v1@-44.977,8.159 v1(-44.955,8.182)
  Bottom Layer w0.25: J3.1@-44.977,6.167 v1@-44.977,8.159 ; v1(-31.997,9.107) -33.123,7.981 -33.123,6.144 -32.317,5.338 -31.377,5.338 -30.583,4.544 J5.1@-30.583,3.519 ; v1(-27.539,9.148) -27.504,9.148 -26.506,8.15 -22.413,8.15 -21.914,7.651 -21.914,6.959 -21.247,6.292 -21.247,6.071 -20.468,5.292 -19.528,5.292 -18.753,4.516 -18.707,4.516 -18.584,4.64 -18.584,5.146 -18.386,5.344 -18.376,5.344 -16.645,7.075 -10.302,7.075 -9.371,6.144 -9.371,6.071 -8.592,5.292 -7.652,5.292 -6.831,4.471 J6.1@-6.831,3.519 ; J4.1@-18.707,3.519 J4.1@-18.707,4.471
JD_DATA_MCU: D1.3 J1.18 R1.1 | length 9.3
  Top Layer w0.25: J1.18 -34.648,15.564 -34.648,14.465 -33.302,13.119 -29.544,13.119 -29.275,12.85 -29.125,12.85 -29.068,12.907 D1.3@-29.025,12.907 ; D1.3 -28.875,12.85 -28.25,13.475 -28.125,13.475 R1.1@-28,13.6
JD_PWR: D5.1 D6.1 D7.1 D8.1 J2.3 J3.3 J4.3 J5.3 J6.3 J11.2 MH4.1 | length 106.7
  Top Layer w0.304: J2.3@-54.335,6.144 -54.248,6.232 -54.248,7.105 -53.956,7.397 -53.729,7.397 v1(-53.672,7.454) ; v1@-53.652,7.474 -46.129,7.474 v1(-46.109,7.494) -42.831,7.494 ; v1(-42.529,8.806) -42.536,8.814 -42.536,11.852 -41.311,13.077 -37.175,13.077 J11.2 ; J3.3@-42.459,6.144 -42.493,6.178 -42.493,7.156 -42.831,7.494 ; D6.1 -30.638,7.288 -30.638,6.199 J5.3@-30.583,6.144 ; v1(-22.464,7.423) -23.264,7.423 -23.372,7.53 -30.65,7.53 -30.65,7.894 -30.844,8.088 -33.453,8.088 v1(-34.046,7.494) -42.831,7.494 ; v1@-22.411,7.476 -22.334,7.476 -21.71,8.1 -18.981,8.1 -18.775,7.894 D5.1 -18.775,6.212 -18.707,6.144 J4.3@-18.707,3.944 ; -10.969,7.414 -10.246,6.691 v1(-10.246,5.7) ; D8.1@-7.8,9.35 -6.95,8.5 D7.1 -4.789,7.5 MH4.1 ; D7.1@-6.948,7.498 -6.948,6.261 J6.3@-6.831,6.144
  Top Layer w0.34: v1(-57.714,6.812) -57.714,7.946 -57.171,8.489 v1(-55.665,8.489) ; J2.3@-54.335,6.144 J2.3@-54.255,6.225 ; D5.1@-18.6,7.375 -10.969,7.375 ; -10.969,7.414 -10.193,8.19 -8.96,8.19 -8.18,8.97 -7.8,9.35 D8.1
  Bottom Layer w0.304: v1(-55.665,8.489) -54.708,8.489 v1(-53.672,7.454) ; v1(-42.529,8.806) -42.494,8.772 -42.494,6.179 J3.3@-42.459,6.144 ; v1(-10.246,5.7) -10.19,5.643 -10.19,5.363 -9.371,4.544 J6.3@-9.371,3.269
  Bottom Layer w0.34: v1@-57.72,6.784 -57.72,5.389 -56.875,4.544 J2.3@-56.875,3.269 ; v1(-46.109,7.494) -46.123,7.48 -46.123,5.668 -44.999,4.544 J3.3@-44.999,3.269 ; v1(-34.046,7.494) -34.092,7.449 -34.092,5.513 -33.123,4.544 J5.3@-33.123,3.269 ; v1(-22.464,7.423) -22.43,7.389 -22.43,5.727 -21.247,4.544 J4.3@-21.247,3.269
NetC1_2: C1.2 FB1.2 R1.2 | length 2.6
  Top Layer w0.203: FB1.2 -27.5,12.6 -27,13.1 -27,13.55 R1.2 -26.925,13.55 C1.2
NetC9_2: C9.2 R7.1 U5.3 U5.4 | length 5.4
  Top Layer w0.254: R7.1 -14.664,12.502 -14.455,12.712 U5.4@-13.193,12.712 ; U5.4 -13.02,12.857 -12.791,12.857 -12.425,13.223 ; C9.2 -12.425,13.223 ; U5.3 -11.886,12.684 -12.425,13.223
NetC12_2: C12.2 D8.2 U5.6 | length 7.2
  Top Layer w0.34: U5.6 -12.993,10.784 -12.268,10.058 -11.456,10.058 -10.816,9.418 -10.736,9.338 -10.656,9.418 -10.496,9.418 -7.833,12.081 D8.2@-7.833,12.206
NetL1_2: L1.2 U4.1
NetR2_2: R2.2 R3.1 U4.4 | length 2.7
  Top Layer w0.3: U4.4 -18.957,11.955 -18.33,12.581 ; R2.2@-18.941,13.109 R2.2 -18.925,13.1 -18.406,12.581 -18.33,12.581 ; R3.1 -18.33,12.581
VBIT: C4.2 D1.2 J1.27 J1.28 J1.29 J1.30 J1.31 J1.32 J11.1 L1.1 U4.3 U4.6 | length 17.6
  Top Layer w0.5: J11.1 -32.541,11.886 -31.139,11.886 D1.2@-31.125,11.9 ; D1.2@-31.025,11.892 -25.428,11.892 ; U4.3 v1(-18.107,8.992) ; -16.997,14.465 -16.425,13.893 v1(-16.425,11.2)
  Top Layer w0.762: J1.27@-23.707,15.815 J1.27 ; J1.30 J1.31 J1.32
  Bottom Layer w0.5: v1(-18.107,8.992) -18.087,9.012 -18.087,9.538 v1(-16.425,11.2)
pads on no net: J1.1 J1.2 J1.3 J1.4 J1.5 J1.6 J1.7 J1.8 J1.9 J1.10 J1.11 J1.12 J1.13 J1.14 J1.15 J1.16 J1.17 J1.19 J1.20 J1.21 J1.22 J1.23 J1.24 J1.25 J1.26 J1.33 J1.34 J1.41 J1.42 J1.43 J1.44 J2. J3. J4. J5. J6.

## Polygon pours and split planes (outlines as drawn)
4V15 on Top Layer "DC_DC_4V05" (solid, pour order 6): -20.207,12.08 -19.641,12.08 -19.651,11.255 -18.957,10.507 -15.968,10.528 -15.968,12.08 -13.903,12.08 -13.903,9.505 -18.107,9.505 -19.026,9.88 -20.207,10.88
VBIT on Top Layer "DC_DC_VUBIT" (solid, pour order 5): -16.703,14.194 -16.703,16.794 -24.003,16.794 -24.103,16.694 -24.103,13.282 -26.128,12.207 -26.128,10.527 -23.715,10.527 -23.707,11.138 -23.205,11.13 -21.935,11.13 -21.935,11.232 -20.548,11.255 -20.548,12.207 -21.961,12.2 -21.961,14.194
GND on Top Layer "GND" (solid, pour order 19): -13.903,14.684 -13.903,16.939 -6.4,16.939 -6.4,14.684
GND on Top Layer "DC_DC_GND" (solid, pour order 13): -20.211,8.512 -19.616,8.499 -19.616,9.5 -20.247,10.484 -23.126,10.484 -23.149,10.507 -23.167,9.693 -20.211,9.693
GND on Top Layer "DC_DC_GND" (solid, pour order 11): -19.619,13.893 -19.619,12.48 -21.666,12.48 -21.666,13.893
4V15 on Top Layer "DC_DC_4V05" (solid, pour order 20): -16.124,10.527 -16.124,8.834 -13.903,8.834 -13.903,9.505 -15.101,9.505
GND on Bottom Layer "GND" (solid, remove dead copper, pour order 24): -58.976,1.644 ccw(c-58.075,1.644) -58.075,0.744 -53.135,0.744 ccw(c-53.136,1.645) -52.235,1.645 -52.235,5.694 cw(c-51.335,5.694) -51.335,6.594 -48.002,6.594 cw(c-48.001,5.693) -47.1,5.694 -47.1,1.644 ccw(c-46.199,1.644) -46.199,0.744 -41.259,0.744 ccw(c-41.259,1.644) -40.359,1.644 -40.359,5.694 cw(c-39.459,5.694) -39.459,6.594 -36.124,6.594 cw(c-36.124,5.694) -35.224,5.694 -35.224,1.644 ccw(c-34.323,1.644) -34.323,0.744 -29.383,0.744 ccw(c-29.383,1.644) -28.483,1.644 -28.483,5.694 cw(c-27.583,5.694) -27.583,6.594 -24.25,6.594 cw(c-24.249,5.693) -23.348,5.694 -23.348,1.644 ccw(c-22.447,1.644) -22.447,0.744 -17.507,0.744 ccw(c-17.507,1.644) -16.607,1.644 -16.607,5.694 cw(c-15.707,5.694) -15.707,6.594 -12.374,6.594 cw(c-12.373,5.693) -11.472,5.694 -11.472,1.644 ccw(c-10.571,1.644) -10.571,0.744 -5.631,0.744 ccw(c-5.631,1.644) -4.731,1.644 -4.731,5.694 cw(c-3.831,5.694) -3.86,6.593 ccw(c-3.831,6.634) -3.827,6.583 -3.133,6.636 ccw(c-3.114,9.207) -0.543,9.207 ccw(c-3.114,9.207) -1.486,11.196 -1.486,12.206 ccw(c-3.094,14.185) -0.543,14.185 ccw(c-3.094,14.185) -1.49,16.168 -1.49,17.734 ccw(c-1.54,17.734) -1.542,17.785 -2.32,17.785 cw(c-1.951,18.434) -2.32,19.084 -1.543,19.084 ccw(c-1.543,19.134) -1.493,19.134 -1.494,26.563 ccw(c-1.541,26.582) -1.49,26.582 ccw(c-2.391,26.582) -2.391,27.482 -4.232,27.482 ccw(c-4.254,27.003) -4.276,27.482 -4.291,27.482 ccw(c-4.291,27.432) -4.315,27.477 ccw(c-4.244,27.134) -4.594,27.134 -4.594,17.334 cw(c-5.043,17.334) -5.493,17.334 ccw(c-5.543,17.334) -5.543,17.385 -31.843,17.385 -58.145,17.385 ccw(c-58.145,17.334) -58.195,17.334 cw(c-58.645,17.334) -59.094,17.323 -59.093,27.127 ccw(c-59.447,27.131) -59.373,27.477 ccw(c-59.396,27.432) -59.396,27.482 -59.411,27.482 ccw(c-59.443,27.134) -59.443,27.484 -61.296,27.482 ccw(c-61.296,26.582) -62.197,26.582 -62.197,19.152 ccw(c-62.147,19.143) -62.147,19.093 -61.37,19.093 cw(c-61.739,18.443) -60.992,18.443 cw(c-61.739,18.443) -61.37,17.794 -62.147,17.794 ccw(c-62.147,17.743) -62.197,17.743 -62.197,16.177 ccw(c-60.593,14.194) -62.201,12.214 -62.201,11.205 ccw(c-60.573,9.215) -60.554,6.645 -59.879,6.594 cw(c-59.877,5.692) -58.976,5.694
GND on Bottom Layer "DC_DC_GND" (solid, pour order 9): -19.649,9.505 -19.643,13.893 -21.7,13.893 -21.714,9.505

## Other copper
Top Layer:
  rectangle net NetL1_2: -26.128,8.419 -20.548,9.532

## Silkscreen, mask and mechanical layers (free items; w line width, h text height)
Top Overlay:
  drawing of 4 lines, arcs and shapes, not listed
  text "GND" at -39.095,13.263 h0.76
  text "VBIT" at -34.323,13.263 h0.76
  text "PWR" at -36.564,8.839 h0.76
  text "DATA" at -41.983,8.785 h0.76
Bottom Overlay:
  drawing of 6 lines, arcs and shapes, not listed
  text "'.ProjectCodenameID'-'.ProjectRevision'" at -7.865,10.515 h0.76
Board Outline:
  lines w0.1: -62.572,9.271 cw(c-60.573,9.215) -62.143,10.454 ; -62.571,9.271 ccw(c-59.919,9.271) -60.552,6.695 ; -62.151,10.459 -62.151,11.183 -62.151,12.935 ; -62.149,12.937 cw(c-60.593,14.194) -62.147,15.453 -62.147,17.743 -61.357,17.743 ccw(c-61.739,18.443) -61.357,19.143 -62.147,19.143 ; -62.147,19.143 -62.147,26.582 cw(c-61.296,26.582) -61.296,27.432 -59.396,27.432 ; -4.291,27.432 -2.391,27.432 cw(c-2.391,26.582) -1.541,26.582 ; -3.133,6.706 ccw(c-3.767,9.282) -1.115,9.282 ccw(c-3.114,9.207) -1.547,10.449 ; -1.547,15.453 cw(c-3.094,14.185) -1.539,12.927 -1.539,10.455 ; -1.544,17.734 -2.333,17.734 cw(c-1.951,18.434) -2.333,19.134 -1.543,19.134 ; -1.544,19.134 -1.544,26.573 ; -1.54,15.459 -1.54,17.734

## Text inside footprints (layer, text, board x,y; h text height)
J2: Mechanical 9 "Jacdac / cable connector  / body" at -50.784,-3.313 h1.7 r180
J3: Mechanical 9 "Jacdac / cable connector  / body" at -38.908,-3.313 h1.7 r180
J4: Mechanical 9 "Jacdac / cable connector  / body" at -15.156,-3.313 h1.7 r180
J5: Mechanical 9 "Jacdac / cable connector  / body" at -27.032,-3.313 h1.7 r180
J6: Mechanical 9 "Jacdac / cable connector  / body" at -3.28,-3.313 h1.7 r180
MH1: Assembly Notes "board outline can  / be on 2.0mm   / radius if necessary" at 0.463,16.988 h0.5 r90; Assembly Notes "5mm dia keepout  / for traces and  / components to  / allow space for  / bushes/standoffs/ / nuts/screw heads" at -3.982,16.988 h0.5 r90
MH2: Assembly Notes "board outline can  / be on 2.0mm   / radius if necessary" at -57.037,16.988 h0.5 r90; Assembly Notes "5mm dia keepout  / for traces and  / components to  / allow space for  / bushes/standoffs/ / nuts/screw heads" at -61.482,16.988 h0.5 r90
MH3: Assembly Notes "5mm dia keepout  / for traces and  / components to  / allow space for  / bushes/standoffs/ / nuts/screw heads" at -61.482,11.99 h0.5 r90; Assembly Notes "board outline can  / be on 2.0mm   / radius if necessary" at -57.037,11.99 h0.5 r90
MH4: Assembly Notes "5mm dia keepout  / for traces and  / components to  / allow space for  / bushes/standoffs/ / nuts/screw heads" at -3.982,11.99 h0.5 r90; Assembly Notes "board outline can  / be on 2.0mm   / radius if necessary" at 0.463,11.99 h0.5 r90